# Altium PCB JTAG20_TO_JTAG10.PcbDoc
Units mil, origin at the board's own origin, x right, y up, seen from the top; angles counter-clockwise.
Board outline 1840.03 x 1510.03 mil, 2 copper layers (Top Layer, Bottom Layer); 3 components, 7 nets, 40 pads, 6 vias.
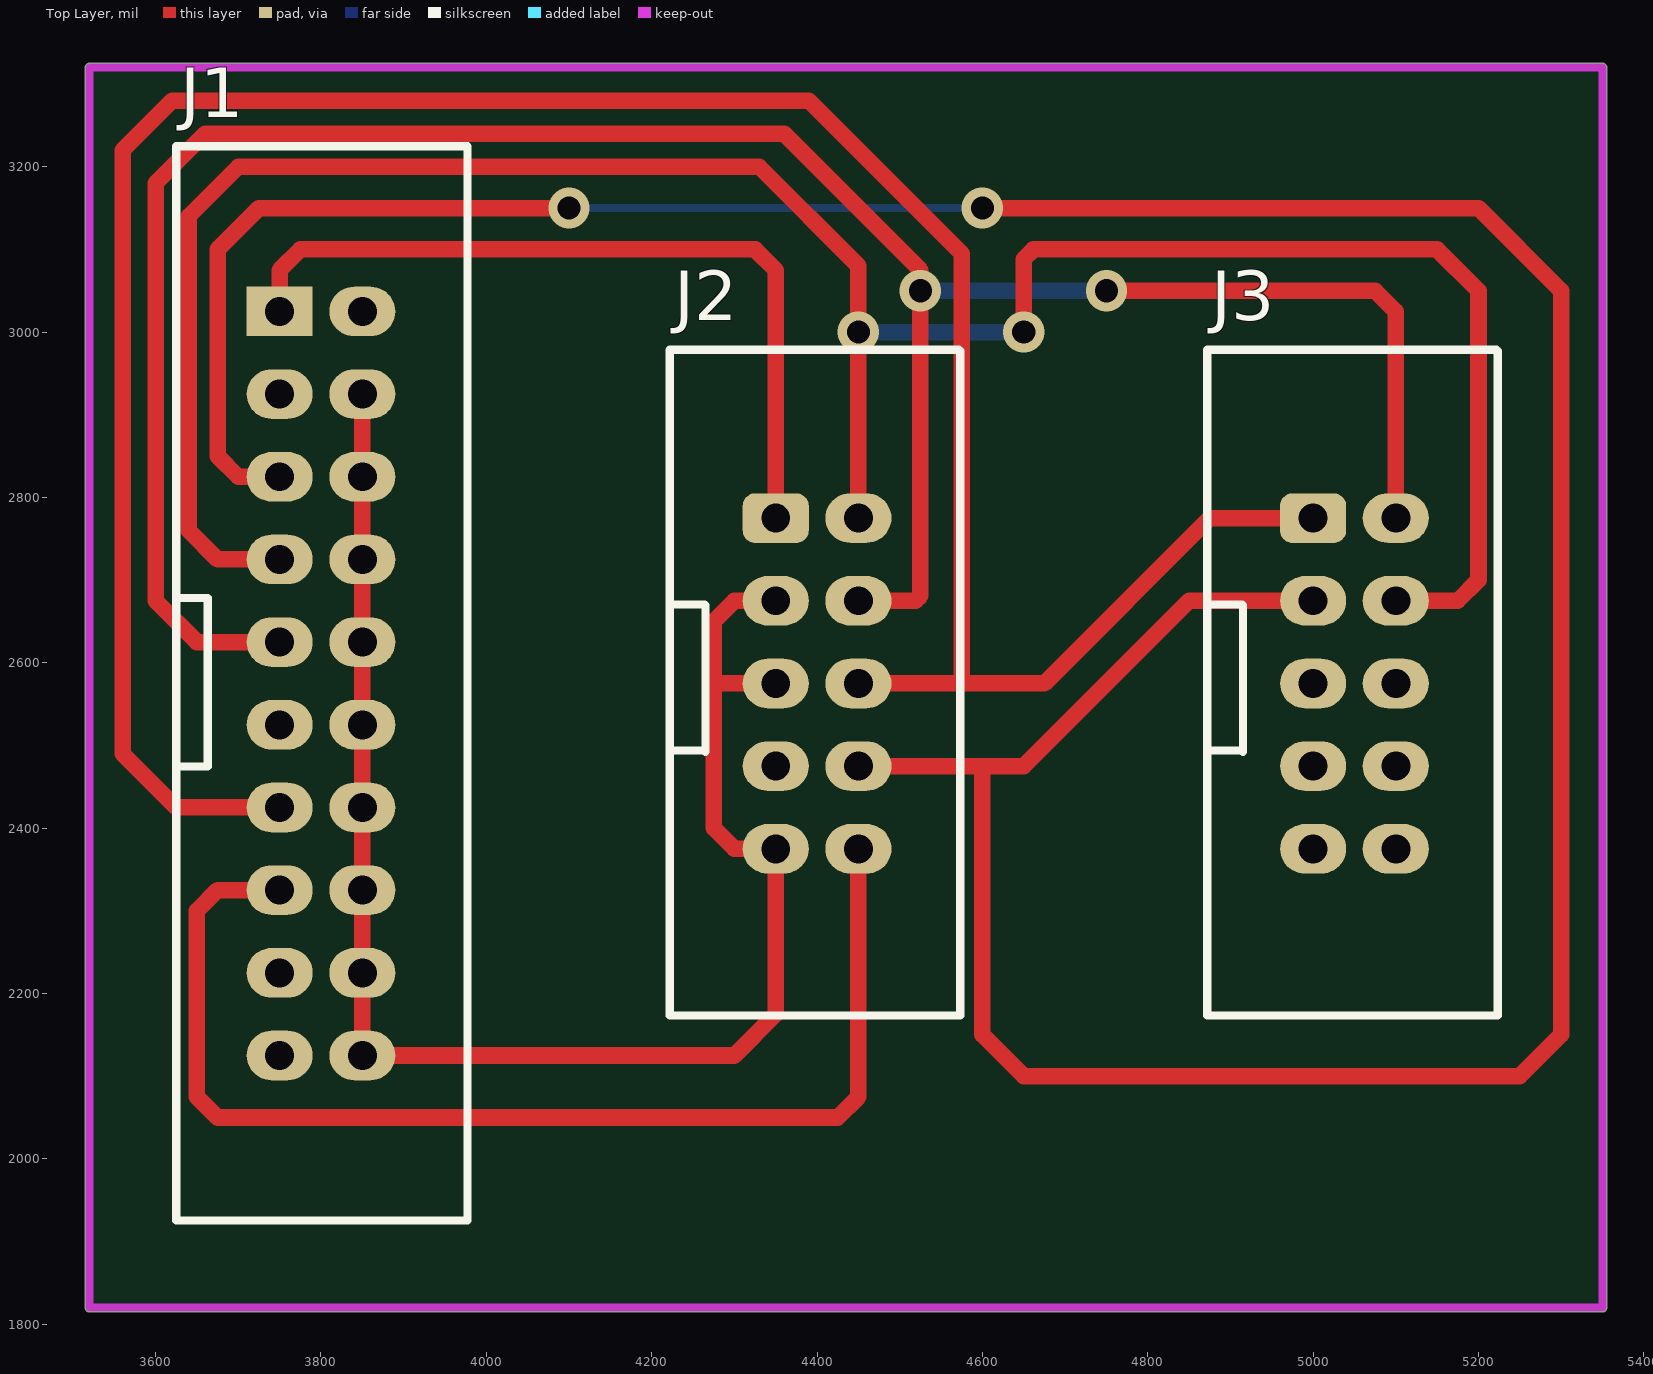
[diagram p0: Top Layer view]
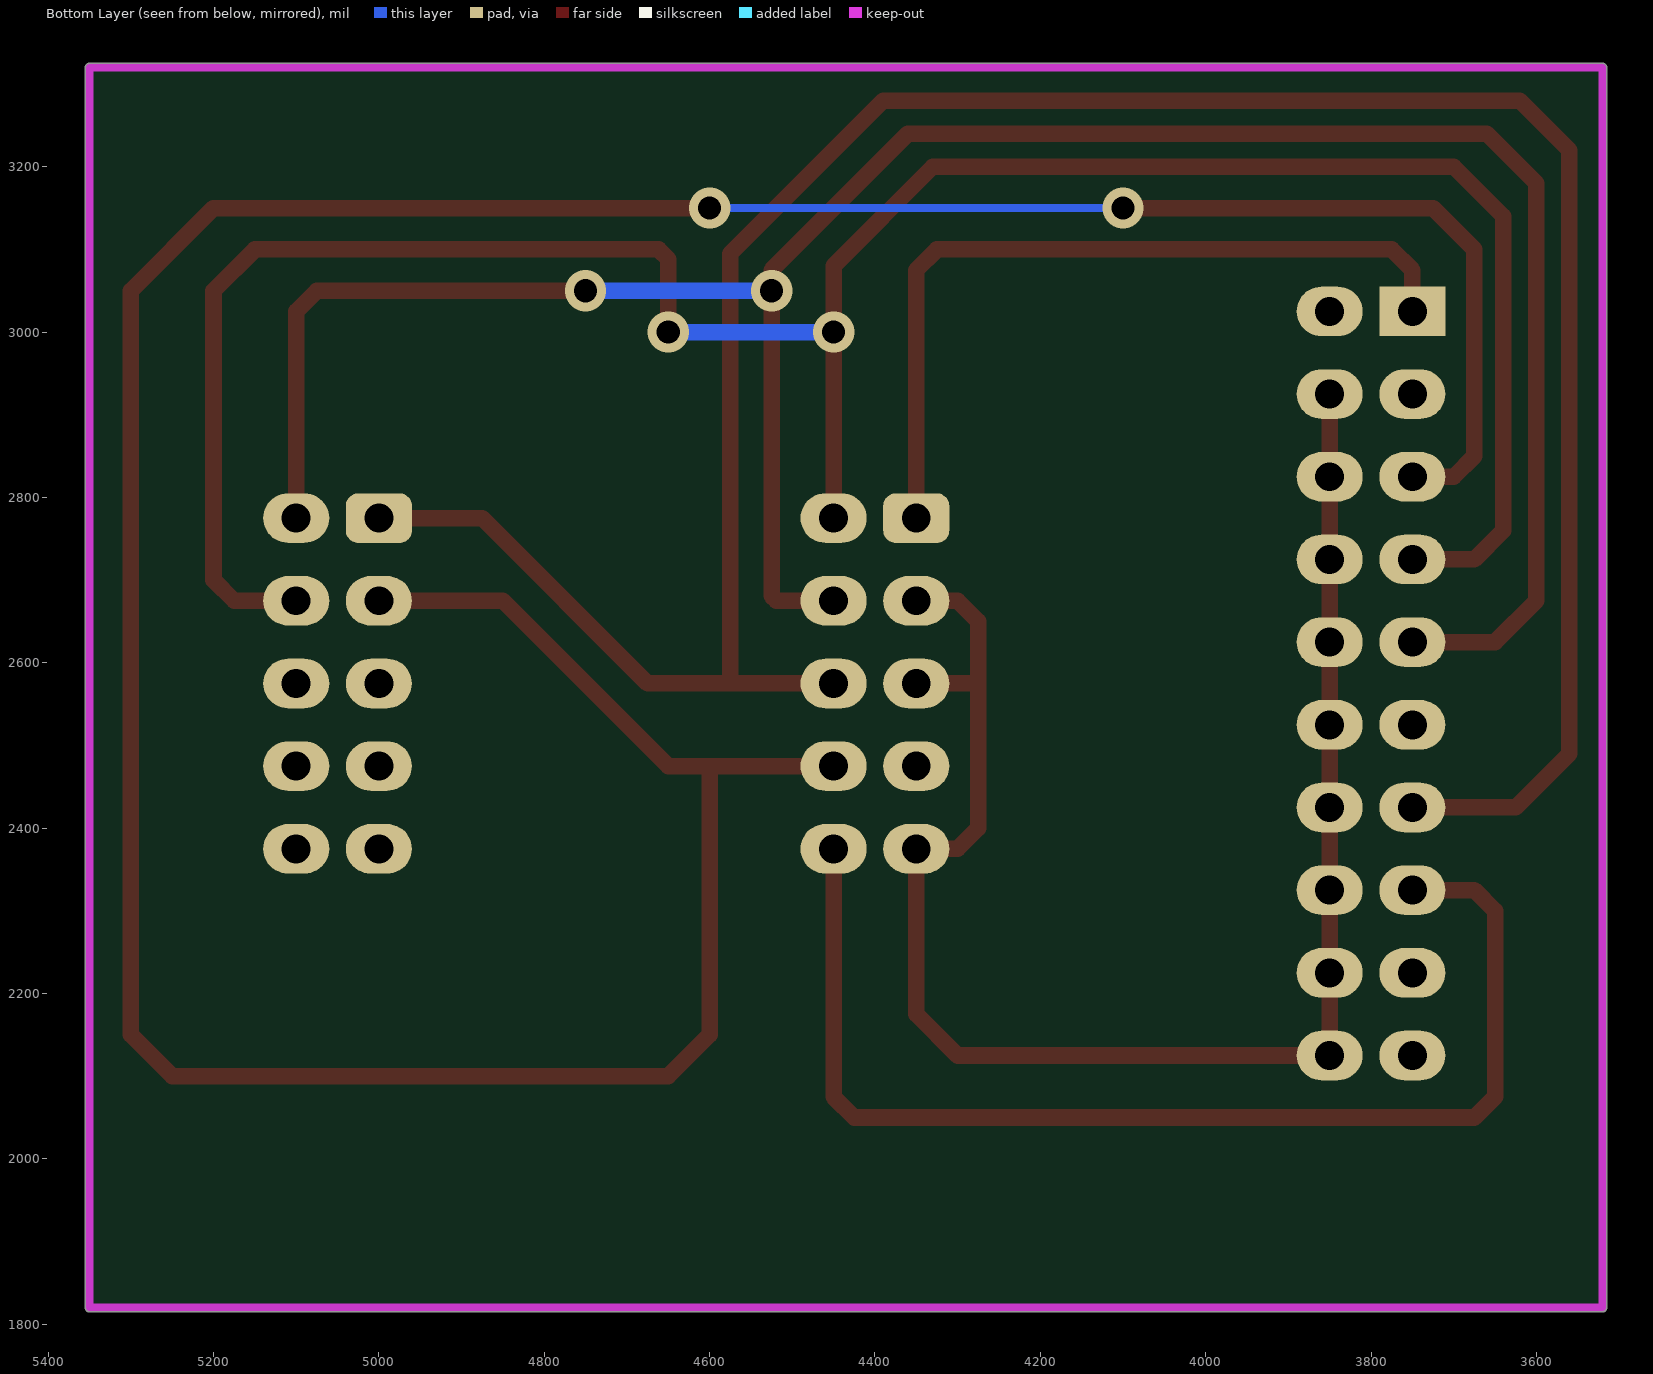
[diagram p1: Bottom Layer view, seen from below]
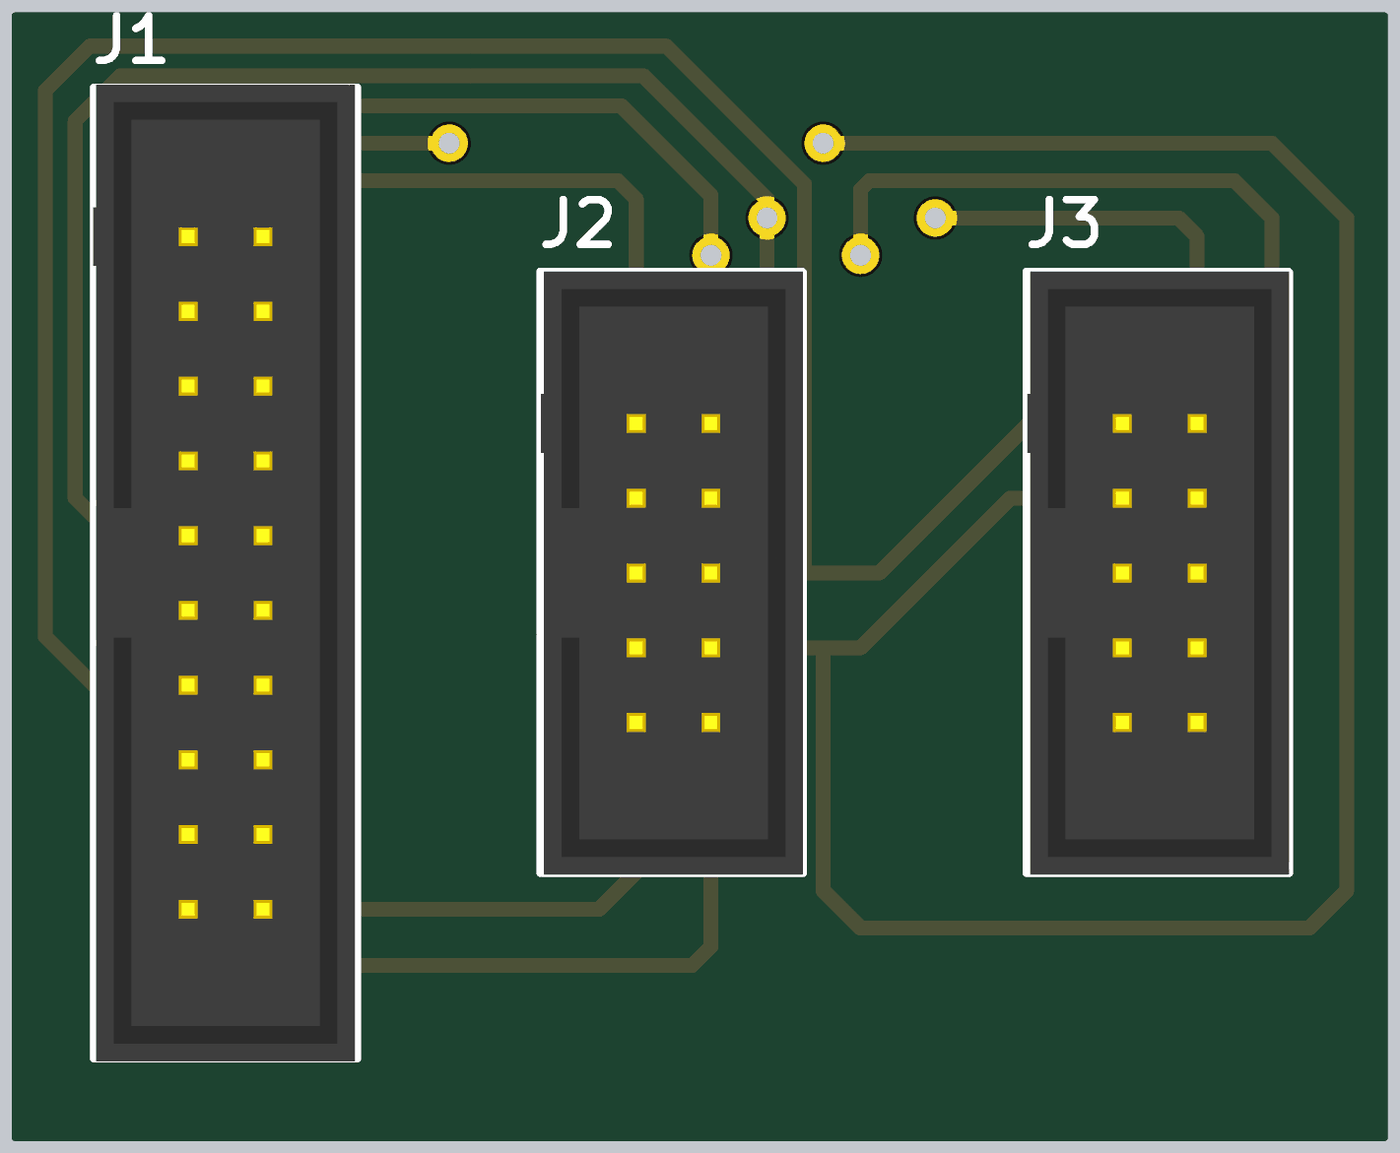
[diagram p2: 3D render of the assembled board from above, using the file's embedded part models]

## Layer stack, top to bottom
Top Solder: solder mask 0.4, Solder Resist, Dk 3.5
Top Layer: signal copper 1.4
Dielectric 1: dielectric 12.6, FR-4, Dk 4.8
Bottom Layer: signal copper 1.4
Bottom Solder: solder mask 0.4, Solder Resist, Dk 3.5

## Board outline
3514.99,1820 ccw(c3520,1820) 3520,1814.98 5350,1814.98 ccw(c5350,1820) 5355.02,1820 5355.02,3320 ccw(c5350,3320) 5350,3325.01 3520,3325.01 ccw(c3520,3320) 3514.99,3320

## Design rules (kind name [scope] priority, off if disabled: settings)
Clearance [All] p1: gap=10 ignorepadtopadclearanceinfootprint=FALSE except(0: Arc-Hole Track-Hole SMDPad-Hole THPad-Hole Via-Hole Fill-Hole Poly-Hole Region-Hole Text-Hole)
PolygonConnect [All] p1: connectstyle=Relief reliefconductorwidth=10 reliefentries=4 polygonreliefangle="90 Angle" airgapwidth=10
RoutingVias [All] p1: holewidth=28 width=50 viastyle="Through Hole" minholewidth=28 minwidth=50 maxholewidth=28 maxwidth=50
SolderMaskExpansion [All] p1: expansion=4 istentingtop=FALSE
Width [All] p1: maxlimit=50 minlimit=10 preferedwidth=10
30 further rules are at their usual default settings.

## Components (designator, comment, footprint, x,y, rotation, side; value= is the part's Value field where it differs from the comment)
J1 "JTAG20" IDC_CONNECTOR_20_2.54 3800,2575 r0 top
J2 "JTAG10/STLINK" IDC_CONNECTOR_10x2.54 4400,2575 r0 top
J3 "SWD" IDC_CONNECTOR_10x2.54 5050,2575 r0 top

## Footprints (in the part's own frame and the unit in brackets; to place one, negate y for a bottom-side part, rotate by r counter-clockwise, add the part's x,y. Pads: shape width x height; smd on the part's side, far side on the other; paste and mask are expansions set on the pad)
IDC_CONNECTOR_10x2.54 [mil]
  rrect50% 80x60 hole 35: 1(-50,200)
  oval 80x60 hole 35: 2(50,200) 3(-50,100) 4(50,100) 5(-50,0) 6(50,0) 7(-50,-100) 8(50,-100) 9(-50,-200) 10(50,-200)
  silkscreen extent -178,-402 173,404, body extent -177,-404 173,404, height 122
IDC_CONNECTOR_20_2.54 [mil]
  rect 80x60 hole 35: 1(-50,450)
  oval 80x60 hole 35: 2(50,450) 3(-50,350) 4(50,350) 5(-50,250) 6(50,250) 7(-50,150) 8(50,150) 9(-50,50) 10(50,50) 11(-50,-50) 12(50,-50) 13(-50,-150) 14(50,-150) 15(-50,-250) 16(50,-250) 17(-50,-350) 18(50,-350) 19(-50,-450) 20(50,-450)
  silkscreen extent -175,-650 177,650, body extent -176,-654 174,654, height 354

## Part data
J1: library part IDC_2.54_10x2
J2 J3: library part IDC_2.54_5x2

## Via types
v1: diameter 50, hole 28, Top Layer to Bottom Layer, 6 vias

## Nets (pads, with @x,y where several pads share a name; then routed paths per layer and width w, separated by ;. In a path a pad name is that pad's centre, name@x,y a point inside that pad or via, vN(x,y) a via of type N, cw(c..) or ccw(c..) an arc to the next point about the centre after c; other vN are vias at no path point)
GND: J1.4 J1.6 J1.8 J1.10 J1.12 J1.14 J1.16 J1.18 J1.20 J2.3 J2.5 J2.9 | length 2016.4
  Top Layer w20: J1.4 J1.6 J1.8 J1.10 J1.12 J1.14 J1.16 J1.18 J1.20 4300,2125 4350,2175 J2.9 4300,2375 4275,2400 4275,2575 ; J2.5 4275,2575 ; J2.3 4300,2675 4275,2650 4275,2575
NetJ1_5: J1.5 J2.8 J3.3 | length 4621.8
  Top Layer w20: J1.5 3700,2825 3675,2850 3675,3100 3725,3150 v1(4100,3150) ; J2.8 4575,2475 4600,2475 ; v1(4600,3150) 5200,3150 5300,3050 5300,2150 5250,2100 4650,2100 4600,2150 4600,2475 ; J3.3 4850,2675 4650,2475 4600,2475
  Bottom Layer w10: v1(4100,3150) v1(4600,3150)
NetJ1_7: J1.7 J2.2 J3.4 | length 3018.3
  Top Layer w20: J1.7 3675,2725 3640,2760 3640,3140 3700,3200 4330,3200 4450,3080 v1(4450,3000) J2.2 ; v1(4650,3000) 4650,3088.28 4661.72,3100 5150,3100 5200,3050 5200,2700 5175,2675 J3.4
  Bottom Layer w20: v1(4450,3000) v1(4650,3000)
NetJ1_9: J1.9 J2.4 J3.2 | length 3100.9
  Top Layer w20: J1.9 3650,2625 3600,2675 3600,3180 3660,3240 4360,3240 4525,3075 v1(4525,3050) 4525,2680.86 4519.14,2675 J2.4 ; v1(4750,3050) 5075,3050 5100,3025 J3.2 5099.99,2875.01
  Bottom Layer w20: v1(4525,3050) v1(4750,3050)
NetJ1_13: J1.13 J2.6 J3.1 | length 3216.2
  Top Layer w20: J1.13 3625,2425 3560,2490 3560,3220 3620,3280 4390,3280 4575,3095 4575,2575 ; J2.6 4575,2575 ; J3.1 4874.99,2774.99 4675,2575 4575,2575
NetJ1_15: J1.15 J2.10 | length 1456.1
  Top Layer w20: J1.15 3675,2325 3650,2300 3650,2075 3675,2050 4425,2050 4450,2075 J2.10
VCC: J1.1 J2.1 | length 970.7
  Top Layer w20: J1.1 3749.99,3074.99 3775,3100 4325,3100 4349.99,3075.01 J2.1
pads on no net: J1.2 J1.3 J1.11 J1.17 J1.19 J2.7 J3.5 J3.6 J3.7 J3.8 J3.9 J3.10

## Keep-outs
Keep-Out Layer:
  lines w10: 3520,1820 3520,3320 5350,3320 5350,1820 3520,1820